# Altium PCB PCB.pcbdoc (part 2 of 3)
Units mm, origin at the board's own origin, x right, y up, seen from the top; angles counter-clockwise.
Board outline 351.03 x 186.31 mm, 2 copper layers (Top Layer, Bottom Layer); 478 components, 293 nets, 1523 pads, 747 vias.
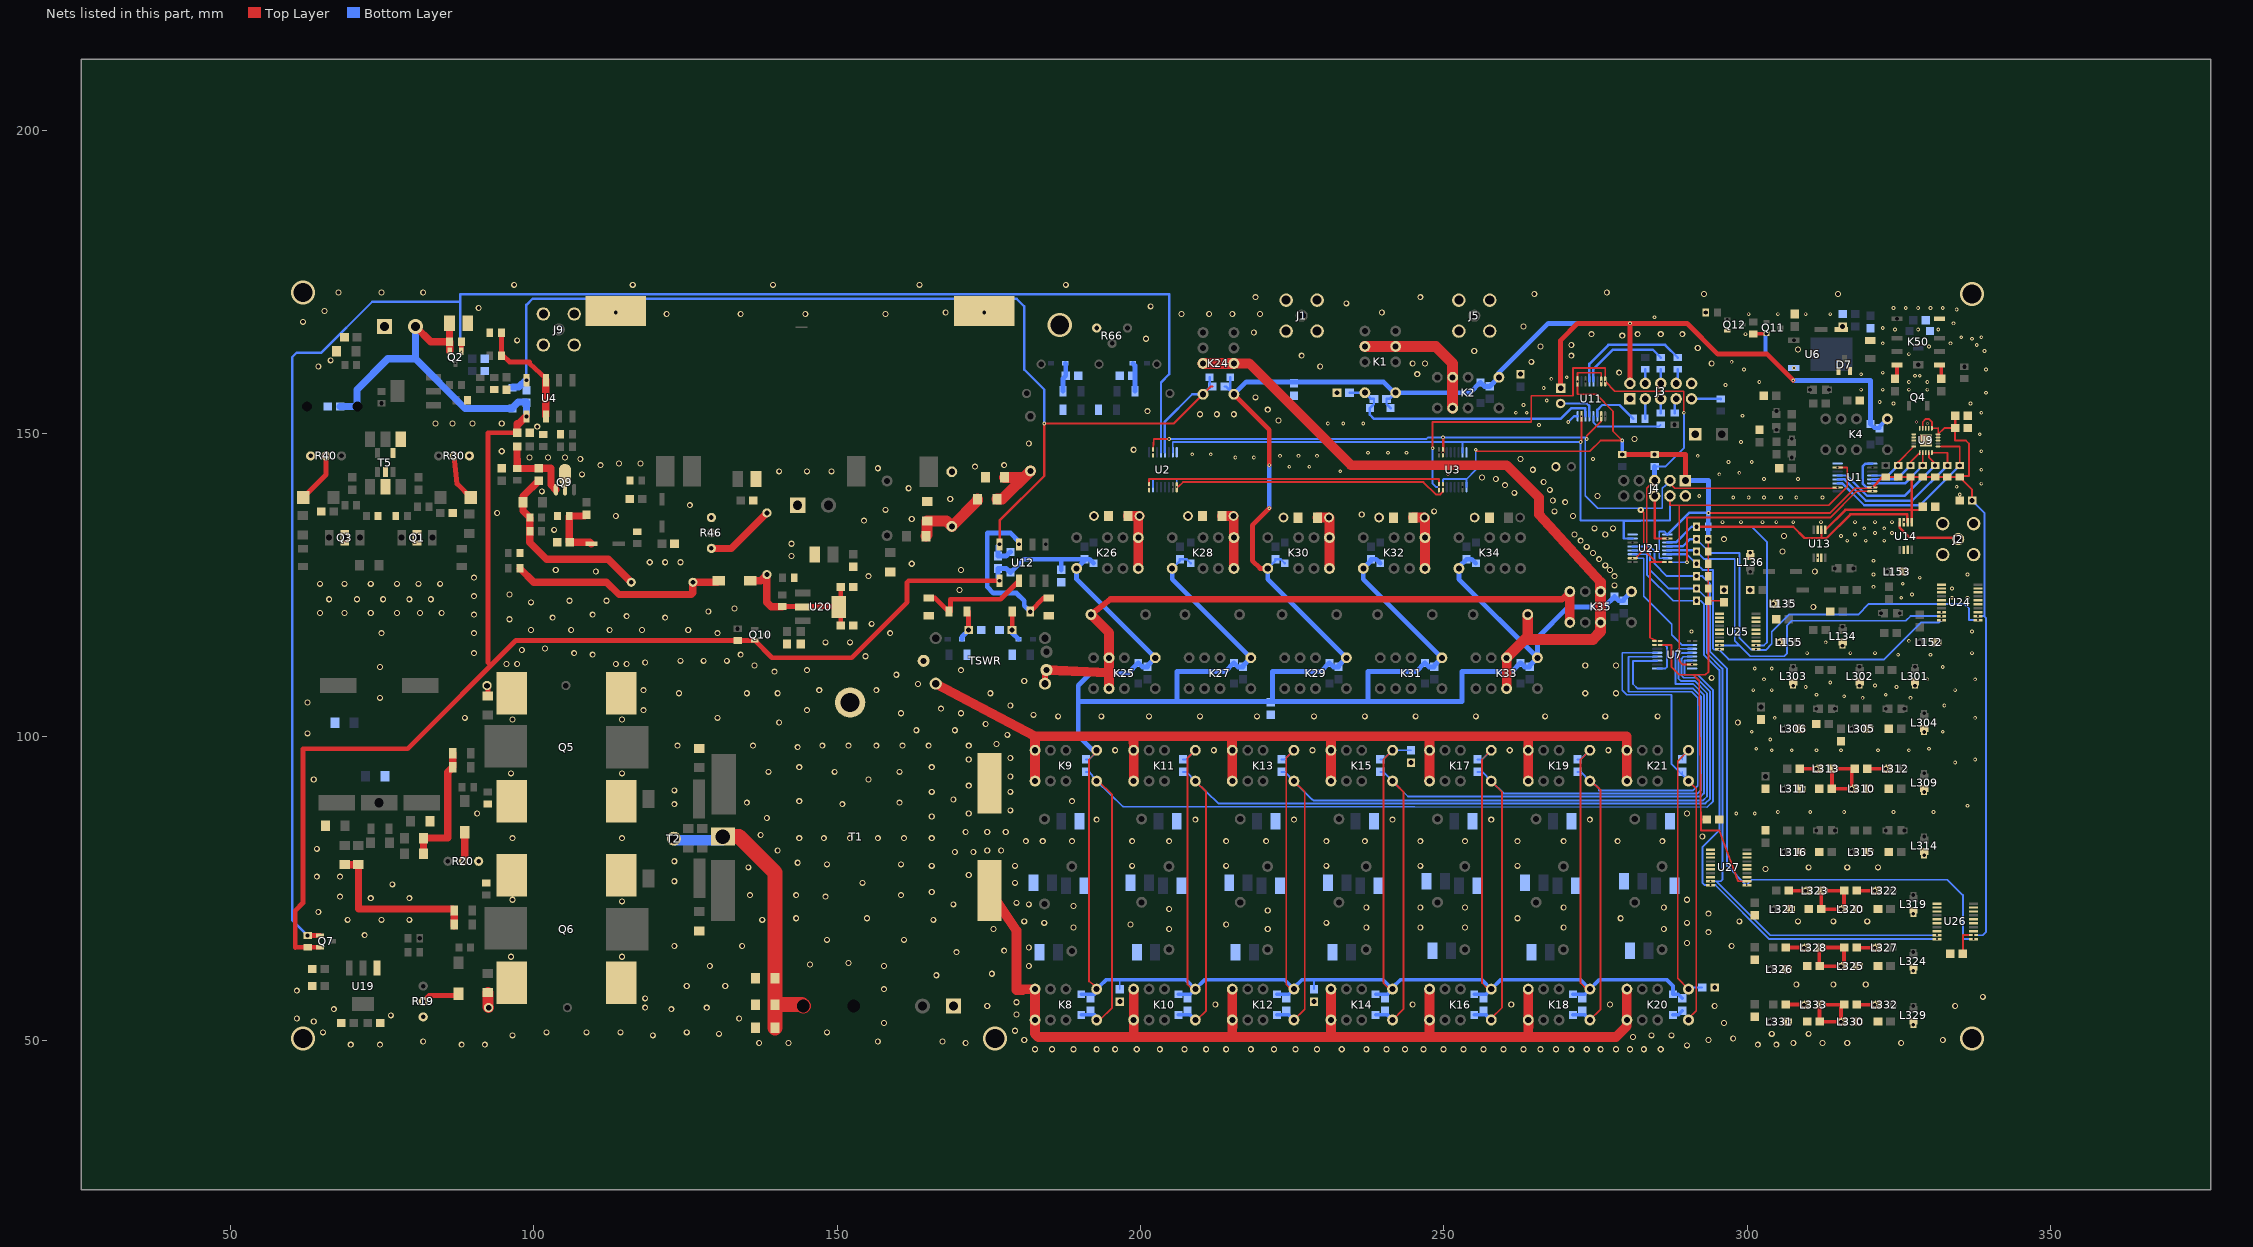
[diagram p2: the nets of this part, all layers, seen from the top]

## Via types
v1: diameter 1, hole 0.61, Top Layer to Bottom Layer, 525 vias
v2: diameter 0.61, hole 0.305, Top Layer to Bottom Layer, 207 vias
v3: diameter 4, hole 3.1, Top Layer to Bottom Layer, 7 vias
v4: diameter 0.61, hole 0.306, Top Layer to Bottom Layer, 3 vias
v5: diameter 0.5, hole 0.305, Top Layer to Bottom Layer, 3 vias
v6: diameter 0.61, hole 0.4, Top Layer to Bottom Layer, 1 vias
v7: diameter 1, hole 0.4, Top Layer to Bottom Layer, 1 vias

## Nets (pads, with @x,y where several pads share a name; then routed paths per layer and width w, separated by ;. In a path a pad name is that pad's centre, name@x,y a point inside that pad or via, vN(x,y) a via of type N, cw(c..) or ccw(c..) an arc to the next point about the centre after c; other vN are vias at no path point)
+3V3: C131.1 C132.1 C241.1 C301.1 C302.1 C303.1 C304.1 J4.1 R13.1 R31.1 R33.1 R35.1 R57.1 R69.1 R70.1 R71.1 R72.1 R201.1 R202.1 R203.1 R204.1 R205.1 R206.1 R207.1 U1.1 U1.7 U2.1 U2.7 U3.1 U3.7 U7.1 U7.7 U9.5 U9.6 U9.9 U11.1 U11.7 U13.1 U14.1 U21.1 U21.7 U24.2 U25.2 U26.2 U27.2 | length 456.2
  Top Layer w0.305: U2.1@205.994,141.224 206.248,141.224 207.01,141.986 246.634,141.986 248.666,139.954 249.428,139.954 249.834,140.36 U3.7@249.835,141.152 ; v2(255.27,147.32) 255.27,147.066 274.066,147.066 275.844,148.844 v2(279.4,148.844) 277.876,150.368 277.876,153.67 275.082,156.464 272.045,156.475 U11.1@272.045,158.568 ; U11.1@272.045,158.568 272.044,160.01 275.946,160.01 U11.7@275.945,158.568 ; U7.7@285.17,115.163 287.528,115.164 287.528,111.506 288.798,110.236 293.116,110.236 293.624,110.744 R202.1@293.574,132.588 ; 291.084,110.236 292.1,109.22 292.354,84.582 295.402,84.582 298.46,76.21 U27.2@299.927,76.211 ; 292.335,86.42 292.395,86.36 C304.1@293.356,86.36 ; R205.1@293.574,122.428 295.896,122.428 C302.1@296.164,122.16 ; v2(293.624,136.906) 313.69,136.906 317.754,140.97 320.467,140.97 U1.7@320.62,141.123 ; R57.1@322.834,142.798 R31.1@332.994,142.798 R72.1@335.026,142.798 337.072,140.752 C301.1@337.072,138.938 ; 327.111,137.414 328.408,137.414 C241.1@328.916,137.922 ; U9.9@328.93,150.851 328.93,151.892 329.438,152.4 329.946,152.4 330.429,151.917 330.429,150.851 331.445,150.851 331.47,150.876 331.47,149.86 331.445,149.835 332.486,150.876 C131.1@334.25,150.876 ; C131.1@334.25,150.876 334.249,148.857 336.042,148.844 336.55,148.336 336.55,143.002 335.229,143.002 R72.1@335.026,142.798 ; C303.1@335.548,64.262 335.545,64.265 335.545,67.321 U26.2@337.265,67.321
  Top Layer w0.4: U13.1@312.887,134.126 316.175,137.414 327.111,137.414 327.111,136.45 ; U1.7@320.62,141.123 322.295,142.798 R57.1@322.834,142.798 ; R70.1@326.898,142.798 327.111,142.585 U14.1@327.111,135.396 ; C131.1@334.25,150.876 C132.1@334.25,152.908
  Top Layer w0.8: R13.1@279.4,146.508 289.764,146.508 289.814,146.558 J4.1@289.814,142.24
  Bottom Layer w0.305: U2.7@202.083,141.152 202.082,142.494 205.984,142.494 U2.1@205.983,141.152 ; U3.7@249.835,141.152 249.834,142.392 249.936,142.494 253.746,142.494 ; U3.1@253.735,141.152 253.746,142.494 ; v2(255.27,147.32) 255.27,144.018 253.746,142.494 ; U7.1@285.17,111.263 286.522,111.262 286.766,111.506 286.766,114.808 286.41,115.164 U7.7@285.17,115.163 ; U21.7@286.838,129.439 285.496,129.438 285.496,133.858 286.319,133.858 U21.1@286.838,133.339 ; R201.1@293.574,134.62 300.736,134.62 303.276,132.08 303.276,115.57 302.768,115.062 U25.2@301.451,115.073 ; C301.1@337.058,138.938 339.09,136.906 339.09,119.899 338.027,119.899 339.079,119.899 339.344,119.634 339.344,67.818 338.836,67.31 U26.2@337.312,67.31
  Bottom Layer w0.4: U21.1@286.838,133.339 290.405,136.906 v2(293.624,136.906) ; U1.7@320.62,141.123 319.633,141.123 319.024,141.732 319.024,144.526 319.521,145.023 U1.1@320.62,145.023
  Bottom Layer w0.61: R13.1@279.4,146.508 v2(279.4,148.844)
  Bottom Layer w0.8: J4.1@289.814,142.24 293.624,142.24 R202.1@293.574,132.588
+12: C1.1 C7.1 C8.1 C9.1 C10.1 C11.1 C16.1 C107.1 C108.2 C109.2 C110.2 C115.1 C118.1 C119.1 C123.2 C124.1 C141.1 C142.2 C143.1 C144.2 C145.1 C146.2 C147.1 C148.2 C149.1 C150.2 C151.1 C152.2 C153.1 C154.2 C157.2 C158.2 C159.2 C160.2 C161.2 C162.2 C163.2 C164.2 C165.2 C166.2 C167.2 D4.1 D5.1 D8.1 D9.1 D13.1 D15.1 D17.1 D20.1 D22.1 D25.1 D27.1 D31.1 D32.1 D38.1 D39.1 D40.1 D41.1 D42.1 D43.1 D44.1 D45.1 D46.1 D47.1 D48.1 H1.1 J3.2 J8.2 K1.1 K2.1 K4.1 K8.1 K9.1 K10.1 K11.1 K12.1 K13.1 K14.1 K15.1 K16.1 K17.1 K18.1 K19.1 K20.1 K21.1 K24.1 K25.1 K26.1 K27.1 K28.1 K29.1 K30.1 K31.1 K32.1 K33.1 K34.1 K35.1 L43.2 Q2.2 Q7.2 Q10.2 Q11.2 R4.1 R41.1 R45.1 R48.2 U4.1 U12.1 | length 1255.3
  Top Layer w0.3: K9.1@193.04,97.79 191.516,96.266 191.516,60.96 191.516,59.69 K8.1@193.294,58.42 ; K10.1@209.042,58.42 208.534,58.42 207.772,59.182 207.772,96.52 K11.1@209.042,97.79 ; K12.1@225.298,58.42 224.79,58.42 224.028,59.182 224.028,96.52 K13.1@225.298,97.79 ; K14.1@241.554,58.42 241.046,58.42 240.03,59.436 240.03,96.266 K15.1@241.554,97.79 ; K16.1@257.81,58.42 257.302,58.42 256.286,59.436 256.286,96.266 K17.1@257.81,97.79 ; K18.1@274.066,58.42 273.558,58.42 272.542,59.436 272.542,96.266 K19.1@274.066,97.79 ; K20.1@290.322,58.42 288.544,60.198 288.544,96.012 K21.1@290.322,97.79
  Top Layer w0.61: R48.2@300.99,166.42 Q11.2@303.093,166.436
  Top Layer w0.8: R4.1@62.738,65.328 60.756,65.328 60.706,65.278 60.706,71.374 61.976,72.644 61.976,98.044 79.248,98.044 97.079,115.875 R45.1@133.604,115.874 Q10.2@136.414,115.89 139.273,113.03 152.4,113.03 161.544,122.174 161.544,125.476 161.798,125.73 U12.1@176.784,125.73 ; R4.1@62.738,65.328 Q7.2@64.786,65.344 ; 92.456,112.268 92.456,150.114 C118.1@97.268,150.114 ; K24.1@215.392,156.464 221.234,150.622 v2(221.234,144.78) ; K30.1@220.98,127.762 219.71,127.762 218.44,129.032 218.44,134.874 v2(221.234,137.668) ; H1.1@269.24,157.48 269.24,165.354 272.034,168.148 v2(280.67,168.148) ; J3.2@280.67,158.242 v2(280.67,168.148) ; v4(307.594,158.75) 303.276,163.068 295.148,163.068 290.068,168.148 v2(280.67,168.148)
  Top Layer w1.2: J8.2@80.518,167.64 83.058,165.1 R41.1@86.156,165.1 86.129,165.127 C119.1@86.129,168.148 ; R41.1@86.156,165.1 Q2.2@86.172,163.56 ; C118.1@97.268,150.114 97.268,151.624 ; 97.268,151.37 U4.1@98.806,152.908
  Bottom Layer w0.3: C142.2@191.008,96.28 191.53,96.28 K9.1@193.04,97.79 ; C144.2@207.01,96.28 207.532,96.28 K11.1@209.042,97.79 ; C146.2@223.266,96.28 223.788,96.28 K13.1@225.298,97.79 ; C148.2@239.522,96.28 240.044,96.28 K15.1@241.554,97.79 ; C150.2@255.524,96.28 256.3,96.28 K17.1@257.81,97.79 ; C152.2@272.034,96.28 272.556,96.28 K19.1@274.066,97.79 ; C154.2@289.306,96.28 289.306,96.774 K21.1@290.322,97.79
  Bottom Layer w0.305: C7.1@196.596,58.434 196.596,59.944 ; C8.1@228.6,58.434 228.6,59.944 ; K15.1@241.554,97.79 C9.1@244.602,97.803 ; K20.1@290.322,58.42 290.576,58.674 C1.1@292.594,58.674
  Bottom Layer w0.4: K28.1@205.232,127.762 206.502,129.032 206.502,129.272 207.61,129.272 D41.1@208.28,128.602 ; C124.1@213.882,157.734 214.122,157.734 K24.1@215.392,156.464 214.806,157.05 D32.1@214.806,159.258 ; K30.1@220.98,127.762 222.25,129.032 222.25,129.272 223.104,129.272 D43.1@223.774,128.602 ; D5.1@241.222,154.178 240.552,154.848 C107.1@240.552,155.702 241.046,155.702 K1.1@242.062,156.718
  Bottom Layer w0.61: D13.1@190.246,57.58 192.454,57.58 193.294,58.42 193.294,58.928 194.31,59.944 207.518,59.944 K10.1@209.042,58.42 ; D15.1@206.248,57.58 208.202,57.58 K10.1@209.042,58.42 ; D17.1@222.504,57.58 224.458,57.58 K12.1@225.298,58.42 ; D20.1@238.76,57.58 240.714,57.58 K14.1@241.554,58.42 ; D22.1@255.016,57.58 256.97,57.58 K16.1@257.81,58.42 ; D25.1@271.272,57.58 273.226,57.58 K18.1@274.066,58.42 ; D27.1@287.782,57.58 287.782,58.928 286.766,59.944 275.59,59.944 K18.1@274.066,58.42 ; D27.1@287.782,57.58 288.636,57.58 C153.1@289.306,56.91 ; Q11.2@303.022,166.37 303.022,163.322 v4(307.594,158.75) ; D9.1@320.294,151.56 320.964,150.89 C123.2@321.818,150.89 321.818,151.13 K4.1@323.088,152.4 ; K10.1@209.042,58.42 210.566,59.944 223.774,59.944 K12.1@225.298,58.42 ; K12.1@225.298,58.42 225.298,58.674 226.568,59.944 240.03,59.944 K14.1@241.554,58.42 ; K14.1@241.554,58.42 241.554,58.674 242.824,59.944 256.286,59.944 K16.1@257.81,58.42 ; K16.1@257.81,58.42 259.334,59.944 272.542,59.944 K18.1@274.066,58.42
  Bottom Layer w0.8: U12.1@176.784,125.73 176.53,125.984 C109.2@176.53,127.748 177.892,127.748 D31.1@178.562,127.078 180.756,129.272 C158.2@190.754,129.272 ; C11.1@186.944,127.522 186.944,129.219 186.997,129.272 ; 189.738,105.802 252.984,105.802 ; D39.1@192.278,128.602 191.608,129.272 C158.2@190.754,129.272 ; K9.1@192.786,97.79 192.151,97.79 189.738,100.203 189.738,108.458 191.77,110.49 197.945,110.49 D38.1@199.644,112.19 ; D38.1@199.644,112.19 200.314,111.52 C157.2@201.168,111.52 201.168,111.76 K25.1@202.438,113.03 189.484,125.984 K26.1@189.484,127.762 190.754,129.032 C158.2@190.754,129.272 ; K28.1@205.232,127.762 205.232,125.984 K27.1@218.186,113.03 216.916,111.76 C159.2@216.916,111.52 216.062,111.52 D40.1@215.392,112.19 213.946,110.744 205.994,110.744 205.994,105.918 ; K24.1@215.392,156.464 217.424,158.496 240.03,158.496 242.062,156.464 K1.1@242.062,156.718 254.332,156.718 D8.1@256.032,158.418 256.702,157.748 C110.2@257.556,157.748 ; K30.1@220.98,127.762 220.98,125.984 K29.1@233.934,113.03 232.664,111.76 C161.2@232.664,111.52 231.81,111.52 D42.1@231.14,112.19 229.694,110.744 221.742,110.744 C10.1@221.742,105.918 ; v2(221.234,137.668) v2(221.234,144.78) ; 237.49,105.918 237.49,110.744 245.442,110.744 D44.1@246.888,112.19 247.558,111.52 C163.2@248.412,111.52 248.412,111.76 K31.1@249.682,113.03 236.728,125.984 K32.1@236.728,127.762 237.998,129.032 237.998,129.272 238.852,129.272 D45.1@239.522,128.602 ; 252.984,105.918 252.984,110.744 261.19,110.744 D46.1@262.636,112.19 263.306,111.52 C165.2@264.16,111.52 264.16,111.76 K33.1@265.43,113.03 ; D47.1@255.27,128.602 254.6,129.272 253.746,129.272 252.476,128.002 K34.1@252.476,127.762 252.476,125.984 K33.1@265.43,113.03 ; C110.2@257.556,157.747 K2.1@259.08,159.258 259.08,160.02 267.208,168.148 v2(280.67,168.148) ; D48.1@278.13,123.112 276.431,121.412 270.51,121.412 265.43,116.332 K33.1@265.43,113.03 ; D48.1@278.13,123.112 278.8,122.442 C167.2@279.654,122.442 279.654,122.682 K35.1@280.924,123.952 ; v4(307.594,158.75) 320.294,158.75 D9.1@320.294,151.56
  Bottom Layer w1.2: C115.1@68.086,154.432 L43.2@70.952,154.432 70.866,154.518 70.866,157.226 75.946,162.306 80.518,162.306 ; D4.1@96.52,154.129 88.695,154.129 80.518,162.306 ; D4.1@96.52,154.256 97.444,155.18 98.806,155.18 U4.1@98.806,152.908 ; 80.518,162.306 J8.2@80.518,167.64 80.518,162.306
ADC: J2.5 U14.4 | length 11.3
  Top Layer w0.4: U14.4@325.161,135.396 325.161,134.44 326.758,132.842 334.518,132.842 J2.5@334.772,132.588
ANT1-2OUT: C107.2 C171.2 D5.2 K1.12 U11.14 | length 45.2
  Bottom Layer w0.4: C171.2@234.456,156.718 K1.12@236.982,156.718 237.998,155.702 C107.2@238.492,155.702 238.492,154.848 D5.2@237.822,154.178 ; D5.2@237.822,154.178 237.823,153.083 238.506,152.4 269.24,152.4 271.018,154.178 273.304,154.178 273.304,152.878 U11.14@273.345,152.836
ANTOUT: K1.4 K1.9 K2.4 K2.9 | length 23
  Top Layer w1.8: K1.9@236.982,164.338 K1.4@242.062,164.338 248.666,164.338 251.46,161.544 K2.4@251.46,159.258 K2.9@251.46,154.178
ATTON0.5: R31.2 U1.12 U9.20 | length 26.6
  Top Layer w0.305: U9.20@330.429,146.837 330.454,146.812 332.994,146.812 R31.2@332.994,144.73
  Bottom Layer w0.4: U1.12@314.888,142.423 316.047,142.423 319.532,138.938 327.202,138.938 R31.2@332.994,144.73
ATTON1: R33.2 U1.13 U9.19 | length 22.1
  Top Layer w0.305: U9.19@329.946,146.837 329.946,146.05 330.962,145.034 R33.2@330.962,144.73
  Bottom Layer w0.4: U1.13@314.888,143.073 316.413,143.073 319.786,139.7 325.932,139.7 R33.2@330.962,144.73
ATTON2: R69.2 U1.6 U9.17 | length 11.6
  Top Layer w0.305: R69.2@328.93,144.73 U9.17@328.93,146.837
  Bottom Layer w0.4: U1.6@320.62,141.773 325.973,141.773 R69.2@328.93,144.73
ATTON4: R70.2 U1.5 U9.16 | length 10
  Top Layer w0.305: R70.2@326.898,144.73 326.898,145.288 U9.16@328.447,146.837
  Bottom Layer w0.4: U1.5@320.62,142.423 324.591,142.423 R70.2@326.898,144.73
ATTON8: R71.2 U1.4 U9.15 | length 9.1
  Top Layer w0.305: R71.2@324.866,144.73 324.866,145.288 U9.15@327.431,147.853
  Bottom Layer w0.4: U1.4@320.62,143.073 323.209,143.073 R71.2@324.866,144.73
ATTON16: R72.2 U1.11 U9.1 | length 30.6
  Top Layer w0.305: 331.907,147.853 335.001,147.853 335.026,147.828 R72.2@335.026,144.73
  Bottom Layer w0.4: U1.11@314.888,141.773 315.681,141.773 319.278,138.176 328.472,138.176 R72.2@335.026,144.73
BANDOUT0: R11.2 U11.4 | length 19.6
  Bottom Layer w0.4: U11.4@273.995,158.568 273.995,161.473 277.114,164.592 286.462,164.592 R11.2@288.544,162.51
BANDOUT1: R3.1 U11.11 | length 8.3
  Bottom Layer w0.4: U11.11@275.295,152.836 275.295,153.883 276.098,154.686 278.942,154.686 R3.1@281.228,152.4
BANDOUT2: R9.2 U11.5 | length 15
  Bottom Layer w0.4: U11.5@274.645,158.568 274.645,160.599 277.876,163.83 284.43,163.83 R9.2@285.75,162.51
BANDOUT3: R8.1 U11.12 | length 12.5
  Bottom Layer w0.305: U11.12@274.645,152.836 274.645,151.821 275.336,151.13 285.446,151.13 R8.1@285.75,151.434
BPF1: C153.2 C154.1 D27.2 K20.12 K21.12 U7.5 | length 79.9
  Top Layer w0.3: K20.12@290.322,53.34 290.322,53.594 291.592,54.864 291.592,91.44 K21.12@290.322,92.71
  Bottom Layer w0.3: C154.1@289.306,94.22 289.306,93.726 K21.12@290.322,92.71
  Bottom Layer w0.305: U7.5@285.17,113.863 279.4,113.863 279.4,107.696 280.162,106.934 287.528,106.934 287.528,95.504 K21.12@290.322,92.71
  Bottom Layer w0.61: D27.2@287.782,54.18 288.636,54.18 C153.2@289.306,54.85
BPF1A0: R203.2 U21.6 U24.20 U25.20 | length 62.7
  Bottom Layer w0.305: R203.2@291.642,128.524 292.658,127.508 294.386,127.508 294.386,114.554 294.517,114.423 U25.20@295.449,114.423 ; U25.20@295.449,114.423 295.448,114.254 296.926,112.776 322.58,112.776 328.676,118.872 331.648,118.872 U24.20@332.025,119.249
  Bottom Layer w0.4: U21.6@286.838,130.089 290.027,130.089 291.592,128.524 R203.2@291.642,128.524
BPF1A1: R204.2 U21.5 U24.19 U25.19 | length 69
  Bottom Layer w0.305: R204.2@291.642,130.556 292.912,129.286 297.942,129.286 297.942,115.824 300.482,113.284 306.07,113.284 306.578,113.792 306.578,118.364 307.34,119.126 326.136,119.126 326.909,119.899 U24.19@332.03,119.899 ; U25.19@295.455,115.072 298.686,115.08
  Bottom Layer w0.4: U21.5@286.838,130.739 291.459,130.739 R204.2@291.642,130.556
BPF1EN: R202.2 U21.4 U24.1 U25.1 | length 74
  Bottom Layer w0.305: R202.2@291.642,132.588 293.929,130.302 298.704,130.302 298.704,116.332 300.614,114.422 U25.1@301.451,114.423 301.574,114.3 303.022,114.3 304.038,115.316 304.038,117.348 306.832,120.142 318.262,120.142 320.04,121.92 335.788,121.92 336.55,121.158 336.55,119.248 U24.1@338.027,119.249
  Bottom Layer w0.4: U21.4@286.838,131.389 289.377,131.389 290.576,132.588 R202.2@291.642,132.588
BPF2: C151.2 C152.1 D25.2 K18.12 K19.12 U7.4 | length 102.5
  Top Layer w0.3: K18.12@274.066,53.34 275.844,55.118 275.844,91.186 274.32,92.71 K19.12@274.066,92.71
  Bottom Layer w0.3: C152.1@272.034,94.22 272.556,94.22 K19.12@274.066,92.71
  Bottom Layer w0.305: K19.12@274.066,92.71 274.32,92.71 275.59,91.44 275.59,91.186 291.084,91.186 291.846,91.948 291.846,106.426 290.83,107.442 280.416,107.442 280.416,113.213 U7.4@285.17,113.213
  Bottom Layer w0.61: D25.2@271.272,54.18 273.226,54.18 K18.12@274.066,53.34
BPF2A0: R205.2 U21.11 U26.20 U27.20 | length 107.8
  Bottom Layer w0.305: U21.11@281.106,130.089 283.464,130.089 283.464,126.746 287.782,122.428 R205.2@291.642,122.428 292.354,122.428 292.862,121.92 292.862,113.538 295.402,110.998 295.402,84.582 292.608,81.788 292.608,75.946 292.993,75.561 U27.20@293.925,75.561 294.771,75.561 303.661,66.671 U26.20@331.263,66.671
BPF2A1: R207.2 U21.12 U26.19 U27.19 | length 107.8
  Bottom Layer w0.305: U21.12@281.106,130.739 283.789,130.739 283.972,130.556 283.972,127.508 287.02,124.46 R207.2@291.642,124.46 ; R207.2@291.642,124.46 293.37,122.733 293.37,113.792 295.91,111.252 295.91,76.454 295.666,76.21 293.931,76.21 294.884,76.21 303.784,67.31 U26.19@331.269,67.31
BPF2EN: R206.2 U21.13 U26.1 U27.1 | length 114.7
  Bottom Layer w0.305: U21.13@281.106,131.389 283.901,131.389 284.734,130.556 284.734,128.524 286.766,126.492 R206.2@291.642,126.492 292.608,126.492 293.878,125.222 293.878,114.046 296.672,111.252 296.672,78.74 299.851,75.561 U27.1@299.927,75.561 299.927,75.645 300.736,76.454 332.994,76.454 335.534,73.914 335.534,66.802 335.665,66.671 U26.1@337.265,66.671
BPF3: C149.2 C150.1 D22.2 K16.12 K17.12 U7.3 | length 117.8
  Top Layer w0.3: K16.12@257.81,53.34 257.81,53.594 259.588,55.372 259.588,90.932 K17.12@257.81,92.71
  Bottom Layer w0.3: C150.1@255.524,94.22 256.3,94.22 K17.12@257.81,92.71
  Bottom Layer w0.305: K17.12@257.81,92.71 259.842,90.678 290.068,90.678 291.846,90.678 292.354,91.186 292.354,96.52 292.354,106.68 291.084,107.95 281.94,107.95 281.178,108.712 281.178,112.522 285.13,112.522 U7.3@285.17,112.563
  Bottom Layer w0.61: D22.2@255.016,54.18 256.97,54.18 K16.12@257.81,53.34
BPF4: C147.2 C148.1 D20.2 K14.12 K15.12 U7.11 | length 129.1
  Top Layer w0.3: K14.12@241.554,53.34 243.332,55.118 243.332,90.932 K15.12@241.554,92.71
  Bottom Layer w0.3: C148.1@239.522,94.22 240.044,94.22 K15.12@241.554,92.71
  Bottom Layer w0.305: K15.12@241.554,92.71 244.094,90.17 289.814,90.17 292.354,90.17 292.862,90.678 292.862,106.934 291.084,108.712 288.163,108.712 288.163,113.919 288.757,114.513 U7.11@290.902,114.513
  Bottom Layer w0.61: D20.2@238.76,54.18 240.714,54.18 K14.12@241.554,53.34
BPF5: C145.2 C146.1 D17.2 K12.12 K13.12 U7.12 | length 145.1
  Top Layer w0.3: K12.12@225.298,53.34 227.076,55.118 227.076,90.932 K13.12@225.298,92.71
  Bottom Layer w0.3: C146.1@223.266,94.22 223.788,94.22 K13.12@225.298,92.71
  Bottom Layer w0.305: K13.12@225.298,92.71 228.346,89.662 ; 228.473,89.535 292.735,89.535 293.37,90.17 293.37,107.188 291.338,109.22 289.052,109.22 288.671,109.601 288.671,113.411 289.052,113.792 290.83,113.792 U7.12@290.902,113.863
  Bottom Layer w0.61: D17.2@222.504,54.18 224.458,54.18 K12.12@225.298,53.34
BPF6: C143.2 C144.1 D15.2 K10.12 K11.12 U7.13 | length 161.5
  Top Layer w0.3: K10.12@209.042,53.34 209.296,53.34 210.82,54.864 210.82,90.932 K11.12@209.042,92.71
  Bottom Layer w0.3: C144.1@207.01,94.22 207.532,94.22 K11.12@209.042,92.71
  Bottom Layer w0.305: K11.12@209.042,92.71 212.852,89.027 293.116,89.027 293.878,89.789 293.878,107.442 291.592,109.728 289.56,109.728 289.179,110.109 289.179,112.903 289.489,113.213 U7.13@290.902,113.213
  Bottom Layer w0.61: D15.2@206.248,54.18 208.202,54.18 K10.12@209.042,53.34
BPF7: C141.2 C142.1 D13.2 K8.12 K9.12 U7.14 | length 178.3
  Top Layer w0.3: K9.12@193.04,92.71 195.326,90.424 195.326,55.372 K8.12@193.294,53.34
  Bottom Layer w0.3: C142.1@191.008,94.22 191.53,94.22 K9.12@192.786,92.71
  Bottom Layer w0.305: K9.12@192.786,92.71 197.104,88.519 293.37,88.392 294.386,89.408 294.386,107.696 291.846,110.236 289.687,110.236 289.687,112.563 U7.14@290.902,112.563
  Bottom Layer w0.61: D13.2@190.246,54.18 192.454,54.18 K8.12@193.294,53.34
BPFON: R201.2 U13.2 U14.2 U21.3 | length 45.6
  Top Layer w0.4: R201.2@291.642,134.62 307.594,134.62 309.443,132.771 312.237,132.771 ; U13.2@312.237,134.125 312.237,132.771 ; U14.2@326.461,135.396 326.39,135.467 326.39,136.652 316.992,136.652 313.111,132.771 312.237,132.771
  Bottom Layer w0.4: U21.3@286.838,132.039 288.249,132.039 290.83,134.62 R201.2@291.642,134.62
C2_1: C2.1 C3.2 C5.2 L3.2 | length 13.2
  Top Layer w1.8: C2.1@164.661,133.096 164.846,133.281 C5.2@164.846,135.567 168.034,135.567 L3.2@168.91,134.692 173.159,138.941 C3.2@173.159,139.192
C3_1: C3.1 C6.2 L2.1 | length 12.1
  Top Layer w1.8: C3.1@176.345,139.192 177.22,139.192 L2.1@181.864,143.836 180.776,142.748 C6.2@177.615,142.748
C53_2: C53.2 R1.1 | length 1.8
  Top Layer w0.8: R1.1@92.444,108.521 92.456,108.509 C53.2@92.456,106.749
C54_2: C54.2 R2.1 | length 2.5
  Top Layer w1.8: C54.2@92.456,57.843 92.456,55.476 R2.1@92.56,55.372
C58_2: C58.2 C61.2 C106.2 L30.1 pad.2 T1.3 T2.5 | length 49.7
  Top Layer w1.8: C58.2@139.7,60.267 C58.2@139.769,60.198
  Top Layer w2.5: T1.3@131.191,83.566 133.858,83.566 139.769,77.655 C58.2@139.769,60.198 C106.2@139.769,52.07 ; C61.2@139.769,55.88 144.186,55.88 L30.1@144.44,55.626
  Bottom Layer w1.8: T2.5@123.376,82.959 131.092,82.959 T1.3@131.445,83.312
C67_2: C65.1 C67.2 C68.2 L33.2 | length 11
  Top Layer w1.2: C67.2@108.712,136.638 108.472,136.398 L33.2@105.868,136.398 105.868,132.144 C68.2@105.932,132.08 109.256,132.08 C65.1@109.51,131.826
C71_2: C69.1 C71.2 Q9.G R26.2 | length 13.1
  Top Layer w1.2: C71.2@97.268,147.828 R26.2@97.282,144.222 ; R26.2@97.282,144.222 100.774,144.222 C69.1@100.838,144.286 ; C69.1@100.838,144.285 102.855,144.285 102.87,141.521 Q9.G@103.656,140.736
C94_2: C92.2 C94.2 R38.1 R74.1 | length 20.8
  Top Layer w1.2: C92.2@81.857,80.772 C94.2@81.857,83.312 85.852,83.312 85.852,94.189 R74.1@86.659,94.996 R38.1@86.659,97.282
C96_1: C84.1 C96.1 K26.5 K26.8 | length 10.6
  Top Layer w1.6: C84.1@197.935,136.398 C96.1@199.838,136.398 199.644,136.204 K26.8@199.644,132.842 K26.5@199.644,127.762
C97_1: C85.1 C97.1 K28.5 K28.8 | length 10.6
  Top Layer w1.6: C85.1@213.429,136.398 C97.1@215.332,136.398 215.392,136.338 K28.8@215.392,132.842 K28.5@215.392,127.762
C98_1: C86.1 C98.1 K30.5 K30.8 | length 10.3
  Top Layer w1.6: C86.1@229.177,136.144 C98.1@231.08,136.144 231.14,136.084 K30.8@231.14,132.842 K30.5@231.14,127.762
C99_1: C87.1 C99.1 K32.5 K32.8 | length 10.3
  Top Layer w1.6: C87.1@244.925,136.144 C99.1@246.828,136.144 246.888,136.084 K32.8@246.888,132.842 K32.5@246.888,127.762
C102_2: C102.2 C104.2 R47.1 R76.1 | length 28
  Top Layer w1.2: C104.2@68.834,78.925 C102.2@71.12,78.925 71.12,71.628 86.659,71.628 R47.1@86.913,71.374 R76.1@86.913,68.834
C112_1: C112.1 K50.4 | length 2.4
  Top Layer w0.61: C112.1@324.358,159.018 324.668,159.328 K50.4@324.668,161.3
C120_1: C120.1 K50.5 | length 2.4
  Top Layer w0.61: K50.5@331.668,161.3 331.978,160.99 C120.1@331.978,159.018
C320_1: C320.1 L312.2 | length 3
  Top Layer w0.61: C320.1@319.8,94.742 L312.2@322.808,94.722
C321_1: C321.1 L313.2 | length 2.8
  Top Layer w0.61: C321.1@308.624,94.742 L313.2@311.378,94.722
C323_2: C320.2 C323.2 L310.2 L313.1 | length 13.6
  Top Layer w0.61: C323.2@313.958,91.44 313.958,94.202 L313.1@314.478,94.722 C320.2@317.74,94.742 ; C323.2@313.958,91.44 L310.2@317.22,91.42 317.22,94.222 C320.2@317.74,94.742
C344_1: C344.1 L322.2 | length 3
  Top Layer w0.61: C344.1@318.022,74.676 L322.2@321.03,74.656
C345_1: C345.1 L323.2 | length 2.8
  Top Layer w0.61: C345.1@306.846,74.676 L323.2@309.6,74.656
C347_2: C344.2 C347.2 L320.2 L323.1 | length 12.9
  Top Layer w0.61: L323.1@312.116,74.676 312.18,74.612 C347.2@312.18,71.628 ; C347.2@312.18,71.628 L320.2@315.442,71.608 315.962,72.128 C344.2@315.962,74.676 ; L323.1@312.7,74.656 C344.2@315.962,74.676
C358_1: C358.1 L327.2 | length 3
  Top Layer w0.61: C358.1@318.022,65.278 L327.2@321.03,65.258
C359_1: C359.1 L328.2 | length 3.6
  Top Layer w0.61: C359.1@306.338,65.278 L328.2@309.93,65.278
C361_2: C358.2 C361.2 L325.2 L328.1 | length 14
  Top Layer w0.61: C361.2@311.926,62.23 311.862,62.294 L328.1@311.862,65.278 C358.2@315.962,65.278 315.962,62.73 L325.2@315.442,62.21 C361.2@311.926,62.23
C372_1: C372.1 L332.2 | length 3
  Top Layer w0.61: C372.1@318.022,55.88 L332.2@321.03,55.86
C373_1: C373.1 L333.2 | length 3.6
  Top Layer w0.61: C373.1@306.338,55.88 L333.2@309.93,55.88
C375_2: C372.2 C375.2 L330.2 L333.1 | length 12.9
  Top Layer w0.61: L333.1@311.862,55.88 311.926,55.816 C375.2@311.926,53.086 ; C375.2@311.926,53.086 L330.2@315.442,53.066 315.442,55.36 C372.2@315.962,55.88 ; L333.1@312.446,55.86 C372.2@315.962,55.88
CTRLCLK: J4.4 U1.15 U2.15 U3.15 U7.15 U11.15 U21.15 | length 179.1
  Top Layer w0.305: v2(272.542,148.59) 272.695,148.743 U11.15@272.695,152.836 ; J4.4@287.274,139.7 287.274,138.176 313.436,138.176 316.484,141.224 316.484,144.374 U1.15@314.888,144.373 ; 288.29,138.176 288.798,138.176 288.798,112.522 289.408,111.912 U7.15@290.902,111.913
  Bottom Layer w0.305: U2.15@205.333,146.884 205.334,148.59 v2(272.542,148.59) 272.542,135.636 287.274,135.636 J4.4@287.274,139.7 ; U3.15@253.085,146.884 253.086,148.59 253.114,148.59
  Bottom Layer w0.4: U21.15@281.106,132.689 279.654,132.69 279.654,135.636 282.395,135.636
CTRLDATA: J4.6 U21.2 | length 9.1
  Top Layer w0.4: J4.6@284.734,139.7 284.734,132.69 U21.2@286.838,132.689
CTRLOE: J4.5 R35.2 U1.8 U2.8 U3.8 U7.8 U11.8 U21.8 | length 208.8
  Top Layer w0.21: U11.8@276.595,158.568 278.191,156.972 289.56,156.972 v2(289.56,153.416) ; J4.5@284.734,142.24 283.464,140.97 283.464,130.302 284.988,128.778 U21.8@286.838,128.789
  Top Layer w0.305: U2.8@201.433,141.152 201.432,142.494 249.174,142.494 U3.8@249.174,141.224 ; v2(248.158,147.574) 248.158,151.892 264.414,151.892 264.414,156.21 271.272,156.21 271.272,160.782 276.606,160.782 U11.8@276.595,158.568 ; U7.8@285.17,115.813 283.972,116.332 283.972,128.788 U21.8@286.838,128.789 ; v2(290.068,128.778) 290.068,136.144 313.69,136.144 318.008,140.462 U1.8@320.62,140.473
  Bottom Layer w0.305: v2(248.158,147.574) 248.158,141.732 248.738,141.152 U3.8@249.185,141.152 ; R35.2@284.734,144.576 286.562,144.576 289.56,147.574 v2(289.56,153.416) ; U21.8@286.838,128.789 286.849,128.778 v2(290.068,128.778)
  Bottom Layer w0.8: J4.5@284.734,142.24 R35.2@284.734,144.576
CTRLRCLK: J4.3 U1.10 U2.10 U3.10 U7.10 U11.10 U21.10 | length 167.3
  Top Layer w0.21: J4.3@287.274,142.24 287.274,141.732 288.036,140.97 314.889,140.97 U1.10@314.888,141.123
  Top Layer w0.305: U2.10@202.083,146.884 202.184,149.098 v2(204.724,149.098) ; v2(273.558,149.098) 273.558,149.606 275.946,151.994 U11.10@275.945,152.836 ; U21.10@281.106,129.439 281.585,129.439 282.956,130.81 282.956,136.906 v7(282.448,137.414)
  Top Layer w0.4: U3.10@249.835,146.884 249.869,146.918 v2(249.869,149.352)
  Bottom Layer w0.21: 286.004,137.668 286.004,140.97
  Bottom Layer w0.305: v2(204.724,149.098) 247.142,149.098 247.396,149.352 v2(249.869,149.352) 273.304,149.352 v2(273.558,149.098) 273.304,149.098 273.304,139.7 275.336,137.668 286.004,137.668 ; U21.10@281.106,129.439 282.956,129.438 282.956,123.19 287.558,118.588 287.558,116.81 289.204,115.164 U7.10@290.902,115.163 ; 286.004,140.97 J4.3@287.147,141.986
D1_1: C113.1 D1.1 R49.2 | length 5
  Top Layer w0.8: R49.2@171.659,120.65 171.659,117.633 C113.1@171.69,117.602
  Bottom Layer w0.8: D1.1@170.591,116.078 170.59,116.502 C113.1@171.69,117.602
D3_1: C117.2 D3.1 R50.2 | length 5
  Top Layer w0.8: C117.2@178.83,117.602 178.861,117.633 R50.2@178.861,120.65
  Bottom Layer w0.8: C117.2@178.83,117.602 178.83,117.178 D3.1@179.929,116.078
D18_2: D18.2 R30.2 | length 7.8
  Top Layer w0.8: R30.2@86.858,146.304 87.376,141.692 D18.2@89.622,139.446
D23_2: D23.2 R40.2 | length 8.4
  Top Layer w0.8: D23.2@62.016,139.446 65.776,143.205 R40.2@65.776,146.304
D35_2: D35.2 R19.2 | length 6.2
  Top Layer w0.8: R19.2@81.788,56.398 82.769,57.379 D35.2@87.63,57.379
D36_2: D36.2 R20.2 | length 4.9
  Top Layer w1.2: R20.2@88.402,79.502 88.646,79.746 88.646,80.284 D36.2@88.646,84.303
D37_2: C78.2 C83.2 D37.2 FB2.2 R51.2 U20.2 U20.4 | length 26.3
  Top Layer w0.8: R51.2@140.97,121.462 150.24,121.462 U20.4@150.29,121.412 ; C83.2@150.608,118.364 C78.2@150.608,124.714
  Top Layer w1.2: D37.2@135.661,125.73 137.414,125.73 FB2.2@138.43,126.746 138.43,122.174 139.142,121.462 R51.2@140.97,121.462
D49_1: C89.1 D49.1 R65.2 | length 4.8
  Bottom Layer w0.8: R65.2@187.243,156.972 187.243,159.063 C89.1@187.692,159.512 187.692,161.46 D49.1@187.609,161.544
D50_1: C90.2 D50.1 R67.2 | length 4.7
  Bottom Layer w0.8: D50.1@198.725,161.544 199.091,161.179 R67.2@199.091,156.972
FANOUT: H1.2 U11.13 | length 6.6
  Bottom Layer w0.4: H1.2@269.24,154.94 273.558,154.94 273.995,154.503 U11.13@273.995,152.836
FB1_1: D37.1 FB1.1 R32.1 | length 36.6
  Top Layer w1.2: R32.1@97.74,127.762 100.026,125.476 112.014,125.476 114.046,123.444 125.984,123.444 126.238,123.698 FB1.1@126.238,125.476 130.277,125.476 D37.1@130.53,125.73
FB1_2: C69.2 FB1.2 L31.2 R21.2 R22.2 | length 31.2
  Top Layer w1.2: C69.2@100.838,142.227 98.298,139.7 98.298,138.753 L31.2@98.229,138.684 98.229,137.278 R21.2@99.364,136.144 R22.2@99.364,133.858 99.364,132.03 102.108,129.286 112.268,129.286 FB1.2@116.078,125.476
FB2_1: FB2.1 R46.3 | length 11.6
  Top Layer w1.2: R46.3@129.286,131.054 132.578,131.054 FB2.1@138.43,136.906
GND: C1.2 C4.1 C5.1 C6.1 C7.2 C8.2 C9.2 C10.2 C11.2 C12.1 C13.1 C14.1 C15.1 C16.2 C17.1 C18.1 C19.1 C20.1 C22.1 C23.1 C24.1 C25.1 C27.1 C28.1 C29.1 C30.1 C32.1 C33.1 C34.1 C35.1 C37.1 C39.1 C40.1 C41.1 C43.1 C44.1 C45.1 C46.1 C52.2 C55.1 C56.1 C58.1 C59.2 C61.1 C62.2 C63.2 C64.2 C68.1 C70.2 C72.1 C73.1 C74.2 C75.2 C76.1 C77.2 C78.1 C79.1 C82.1 C83.1 C84.2 C85.2 C86.2 C87.2 C88.2 C89.2 C90.1 C91.1 C95.1 C96.2 C97.2 C98.2 C99.2 C100.2 C103.1 C105.1 C106.1 C113.2 C114.2 C115.2 C116.1 C117.1 C118.2 C119.2 C121.1 C122.1 C126.2 C127.1 C128.2 C129.2 C130.1 C131.2 C132.2 C133.2 C136.2 C137.2 C170.1 C171.1 C204.1 C207.1 C208.1 C210.2 C241.2 C301.2 C302.2 C303.2 C304.2 C307.1 C313.1 C314.1 C315.1 C322.1 C323.1 C324.1 C334.1 C335.1 C336.1 C346.1 C347.1 C348.1 C360.1 C361.1 C362.1 C374.1 C375.1 C376.1 C388.1 C389.1 C390.1 D2.2 D7.1 D7.2 D51.2 J1.1 J1.2 J1.3 J1.4 J2.1 J2.2 J2.3 J2.4 J3.1 J3.10 J4.2 J5.1 J5.2 J5.3 J5.4 J6.1 J7.1 J8.1 J9.1 J9.2 J9.3 J9.4 K50.8 L3.1 L32.1 L33.1 L34.1 L134.1 L135.1 L136.1 L152.1 L153.1 L155.1 L301.1 L302.1 L303.1 L304.1 L305.1 L306.1 L309.1 L310.1 L311.1 L314.1 L315.1 L316.1 L319.1 L320.1 L321.1 L324.1 L325.1 L326.1 L329.1 L330.1 L331.1 pad.3 pad.4 pad.7 pad.8 Q1.2 Q3.2 Q4.2 Q5.S Q6.S Q9.S Q12.2 R14.1 R19.3 R20.1 R24.1 R25.1 R30.3 R36.1 R37.1 R40.1 R42.1 R43.2 R46.1 R53.1 R54.2 R55.1 R56.2 R58.2 R62.1 R63.1 R64.1 R66.3 R68.2 R73.1 R75.2 R77.2 R78.1 T1.5 T5.2 T5.6 TSWR.7 U1.16 U2.16 U3.16 U6.1 U7.16 U9.3 U9.4 U9.7 U9.8 U9.10 U9.11 U9.12 U9.13 U9.18 U9.21 U11.16 U13.3 U13.6 U13.7 U14.3 U14.6 U14.7 U19.1 U21.16 U24.3 U24.5 U24.6 U24.8 U24.9 U24.11 U24.12 U24.13 U24.15 U24.16 U24.18 U25.3 U25.5 U25.6 U25.8 U25.9 U25.11 U25.12 U25.13 U25.15 U25.16 U25.18 U26.3 U26.5 U26.6 U26.8 U26.9 U26.11 U26.12 U26.13 U26.15 U26.16 U26.18 U27.3 U27.5 U27.6 U27.8 U27.9 U27.11 U27.12 U27.13 U27.15 U27.16 U27.18 | length 1.9
  Bottom Layer w0.4: v2(270.51,151.892) 271.454,152.836 U11.16@272.045,152.836
  other v1: 182.626,48.514 185.42,48.514 188.976,48.514 192.786,48.514 195.834,48.514 199.39,48.514 203.2,48.514 207.264,48.514 210.82,48.514 214.122,48.514 218.186,48.514 221.996,48.514 225.552,48.514 229.108,48.514 233.172,48.514 237.236,48.514 240.538,48.514 243.586,48.514 246.634,48.514 249.936,48.514 253.238,48.514 256.54,48.514 259.842,48.514 263.144,48.514 265.938,48.514 268.478,48.514 271.018,48.514 273.558,48.514 275.844,48.514 278.384,48.514 280.67,48.514 282.956,48.514 285.75,48.514 290.068,49.149 69.85,49.276 74.676,49.276 88.138,49.276 91.948,49.276 301.752,49.276 304.8,49.276 137.16,49.53 141.986,49.53 171.196,49.53 307.594,49.53 312.42,49.53 316.484,49.53 325.374,49.53 81.788,49.784 156.718,49.784 167.386,49.784 180.848,50.038 293.624,50.038 332.232,50.038 297.688,50.292 281.178,50.546 96.52,50.8 119.634,50.8 284.226,50.8 287.528,50.8 130.556,51.054 304.038,51.054 310.134,51.054 65.278,51.308 102.108,51.308 108.712,51.308 114.3,51.308 125.222,51.308 148.336,51.308 179.324,51.562 157.734,52.832 296.164,52.832 63.754,53.086 60.96,53.594 133.858,53.594 76.454,54.102 179.578,54.229 67.056,55.118 122.682,55.118 118.364,55.372 128.524,55.372 174.752,55.626 294.64,55.626 334.264,55.626 212.344,55.88 244.856,55.88 261.112,55.88 277.368,55.88 179.578,56.261 118.364,56.896 338.836,57.15 60.96,58.166 157.734,58.42 125.222,58.928 131.572,58.928 308.102,59.182 314.198,59.182 319.532,59.182 166.37,60.706 175.514,60.96 129.032,62.23 157.734,62.23 181.61,62.23 145.542,62.484 151.892,62.738 96.266,63.754 114.554,63.754 169.672,64.516 177.546,64.77 181.61,65.278 123.19,65.532 134.366,65.532 297.434,65.532 290.068,66.04 148.336,66.548 161.036,66.548 72.136,67.31 293.624,67.818 175.768,68.326 204.724,68.326 220.98,68.326 286.258,68.326 188.976,68.58 237.236,68.58 246.126,68.58 253.492,68.58 269.748,68.58 198.374,69.088 214.122,69.088 184.15,69.342 230.632,69.342 290.068,69.342 180.848,69.596 298.704,69.596 308.356,69.596 314.198,69.596 319.786,69.596 69.342,69.85 74.93,69.85 79.502,69.85 137.668,69.85 165.862,69.85 143.256,70.104 154.94,70.104 262.128,70.104 279.146,70.104 293.624,70.866 64.516,71.12 220.98,71.374 204.724,71.628 237.236,71.882 246.126,71.882 253.492,71.882 269.748,71.882 286.258,71.882 188.976,72.136 169.164,72.39 181.61,72.39 179.578,72.644 114.554,72.898 96.52,73.152 290.068,73.152 73.152,73.406 79.502,73.406 68.072,73.66 148.082,73.66 135.636,73.914 143.256,73.914 160.528,73.914 165.608,74.422 76.708,75.692 154.178,75.946 179.324,75.946 123.19,76.2 64.262,76.962 68.072,76.962 171.704,77.216 303.022,78.232 135.382,78.486 310.134,78.486 316.484,78.486 321.564,78.486 165.608,78.74 179.324,78.74 198.628,78.74 214.122,78.74 230.632,78.74 246.126,78.74 262.128,78.74 148.336,78.994 160.528,78.994 143.51,79.248 123.19,79.502 169.418,81.026 172.466,81.026 140.208,81.28 174.752,81.28 177.038,81.28 64.262,81.534 181.102,82.804 183.896,82.804 188.722,82.804 198.628,82.804 204.724,82.804 214.122,82.804 220.726,82.804 230.632,82.804 236.982,82.804 246.126,82.804 253.492,82.804 262.128,82.804 269.748,82.804 278.638,82.804 286.004,82.804 96.52,83.312 114.554,83.312 143.764,83.312 147.828,83.312 152.146,83.312 156.718,83.312 161.036,83.312 165.608,83.312 292.608,83.566 137.414,83.82 171.196,84.328 174.752,84.328 177.8,84.328 192.786,86.36 209.042,86.36 225.298,86.36 241.554,86.36 257.81,86.36 274.066,86.36 138.43,86.614 165.608,86.868 90.678,87.376 171.704,87.376 290.068,87.376 178.562,87.884 123.19,88.9 150.876,88.9 135.128,89.154 160.274,89.154 143.764,89.408 188.722,89.408 169.164,89.662 165.608,90.932 178.562,90.932 123.19,91.186 171.704,91.948 63.754,92.964 155.194,92.964 178.562,93.472 96.266,93.98 114.554,93.98 138.684,94.234 149.606,94.234 160.274,94.234 143.764,94.996 165.608,94.996 171.704,96.266 178.562,96.52 195.834,97.79 212.09,97.79 228.346,97.79 260.858,97.79 277.114,97.79 143.51,98.298 123.698,98.552 136.144,98.552 147.574,98.552 151.892,98.552 156.464,98.552 160.782,98.552 165.1,98.552 171.704,98.552 176.276,98.806 178.054,100.33 62.738,100.584 163.068,101.092 169.418,101.092 174.498,102.108 140.462,102.362 298.45,102.362 96.52,102.87 114.554,102.87 88.646,103.124 130.302,103.124 186.436,103.378 193.548,103.378 201.422,103.378 209.804,103.378 219.202,103.378 228.6,103.378 236.982,103.378 245.364,103.378 255.27,103.378 266.7,103.378 276.606,103.378 285.242,103.378 182.372,103.632 160.528,103.886 170.434,103.886 118.11,104.394 145.034,104.394 167.132,104.648 178.562,105.156 62.738,105.664 74.676,106.426 123.952,107.188 135.128,107.188 140.208,107.188 175.26,107.188 273.304,107.188 278.384,107.188 118.11,107.696 147.066,107.696 156.464,107.696 163.322,108.712 180.848,109.22 294.132,109.728 159.766,110.236 139.7,110.744 145.034,110.998 170.434,110.998 74.676,111.506 136.398,111.76 273.304,111.76 278.384,111.76 95.504,112.014 97.282,112.014 113.538,112.014 115.316,112.014 118.364,112.268 124.206,112.522 128.016,112.522 131.826,112.522 154.686,113.284 109.728,113.538 134.112,113.538 90.17,113.792 106.68,113.792 98.044,114.3 101.854,114.554 148.082,115.57 152.146,115.57 74.93,117.094 90.17,117.094 130.302,117.094 158.75,117.094 99.568,117.602 106.172,117.602 112.522,117.602 117.856,117.602 125.476,117.602 155.702,118.618 96.012,119.38 103.124,119.634 121.666,119.634 115.316,119.888 90.17,120.142 109.728,120.142 64.77,120.396 68.834,120.396 73.152,120.396 77.47,120.396 81.28,120.396 84.836,120.396 128.778,120.65 133.096,121.158 310.896,121.412 99.568,122.174 105.918,122.428 112.014,122.428 66.294,122.682 70.866,122.682 75.184,122.682 79.502,122.682 83.058,122.682 90.17,123.19 96.012,123.444 170.18,124.206 278.13,124.968 64.77,125.222 68.834,125.222 73.152,125.222 77.47,125.222 81.026,125.222 84.582,125.222 90.17,126.238 155.194,126.492 278.13,126.492 110.236,127.254 311.15,127.254 103.632,127.508 170.434,127.508 277.368,127.508 276.606,128.27 162.306,128.524 119.126,128.778 121.666,128.778 124.206,128.778 275.59,129.286 142.494,129.794 274.574,130.302 305.816,130.556 273.558,131.318 142.494,131.826 272.542,132.334 296.164,132.588 306.07,133.096 271.526,133.35 276.606,133.35 103.378,134.112 274.828,134.366 277.876,134.366 154.432,135.636 162.306,135.89 113.538,136.398 271.272,136.398 236.474,136.652 93.98,136.906 248.412,137.16 268.224,137.16 157.988,137.414 125.73,138.176 270.002,138.684 267.97,138.938 168.656,139.192 275.336,139.7 261.62,140.208 101.346,140.462 267.462,140.716 161.798,140.97 260.096,141.478 266.446,141.986 258.572,142.494 256.286,142.748 107.95,143.256 140.462,143.764 145.034,143.764 149.098,143.764 264.668,144.018 156.718,144.272 172.72,144.526 110.998,144.78 177.546,144.78 114.046,145.034 117.602,145.034 107.696,145.796 262.636,145.796 99.314,146.05 102.362,146.05 105.156,146.05 94.742,147.066 198.882,147.32 181.61,148.336 281.432,149.098 100.584,151.13 83.82,151.638 86.614,151.638 89.916,151.638 94.742,151.638 222.758,152.146 209.804,153.162 212.598,153.162 215.392,153.162 201.168,153.67 220.98,153.924 218.948,155.956 245.618,159.766 278.892,160.02 64.516,161.036 229.616,161.036 244.856,161.544 246.888,161.544 294.132,161.544 264.414,161.798 66.548,162.052 226.568,162.814 271.018,162.814 255.016,163.576 308.356,163.83 291.846,164.084 265.938,164.338 271.018,164.592 97.282,165.354 200.914,165.608 279.4,166.116 274.32,166.37 281.94,166.37 285.75,166.37 289.306,166.37 218.694,166.624 263.144,167.64 61.976,168.402 121.92,169.672 134.112,169.672 144.78,169.672 157.988,169.672 206.756,169.672 211.328,169.672 215.138,169.672 219.71,169.672 113.538,169.926 167.894,169.926 174.244,169.926 239.776,169.926 65.532,170.18 90.932,170.688 201.676,170.942 233.934,171.45 218.948,172.466 246.126,172.466 264.922,172.974 292.862,172.974 314.96,172.974 67.818,173.228 74.93,173.228 81.788,173.228 276.86,173.228 96.774,174.498 116.332,174.498 139.446,174.498 163.576,174.498 187.706,174.498
  other v2: 298.196,87.376 301.244,87.376 305.054,87.63 310.388,87.63 315.976,87.63 324.104,87.63 330.708,87.63 336.296,88.646 334.264,95.758 337.566,96.266 304.038,97.79 307.34,97.79 311.404,97.79 315.468,97.79 321.564,97.79 326.644,97.79 301.498,98.044 329.946,98.044 303.784,99.568 300.736,100.838 332.232,100.838 304.546,103.124 337.566,103.124 332.486,105.156 319.024,106.426 326.898,106.426 315.976,106.68 311.404,106.934 322.834,106.934 300.99,107.696 304.038,107.696 334.264,107.696 309.626,108.204 324.612,108.204 321.056,108.458 313.69,108.966 302.768,109.474 329.692,109.474 337.566,109.474 301.244,111.252 304.038,111.252 332.232,111.506 324.866,113.538 330.2,113.538 309.88,113.792 316.992,113.792 321.056,113.792 337.058,113.792 312.928,115.57 326.644,115.824 290.83,117.348 337.058,117.348 325.374,122.936 333.756,122.936 336.296,122.936 327.152,123.444 333.756,124.46 320.802,124.714 325.628,125.222 328.422,126.238 320.802,126.746 336.296,126.746 320.802,129.032 316.484,132.334 319.532,132.334 322.58,132.334 315.468,133.096 317.754,133.35 321.056,133.604 323.85,133.604 319.278,134.366 322.58,134.366 295.91,135.382 298.958,135.382 302.514,135.382 304.8,135.382 307.594,135.382 312.166,135.382 317.754,135.382 321.056,135.382 323.85,135.382 297.688,139.446 300.228,139.446 302.768,139.446 305.562,139.446 308.102,139.446 312.42,139.446 292.1,139.7 335.026,139.954 334.518,141.224 338.582,141.732 302.768,142.494 308.356,142.494 295.402,143.256 298.704,143.51 232.918,143.764 338.582,144.018 224.536,144.526 227.838,144.526 296.926,145.288 300.736,145.288 274.574,145.796 215.646,146.05 218.694,146.05 223.012,146.304 226.06,146.304 229.108,146.304 291.846,146.304 208.534,146.558 211.582,146.558 237.49,146.812 240.792,146.812 243.84,146.812 338.582,147.066 298.958,148.59 338.328,149.86 265.684,151.384 230.886,151.638 233.426,151.638 236.728,151.638 299.212,152.908 261.874,153.416 263.652,153.416 338.582,153.416 263.144,154.686 324.104,154.94 336.804,154.94 321.818,155.194 266.954,155.448 339.344,156.718 318.77,157.226 322.326,157.226 326.644,157.226 329.692,157.226 266.446,157.48 296.418,157.988 302.006,158.496 326.644,158.496 329.692,158.496 267.716,159.004 270.256,159.258 327.66,159.512 328.422,159.512 318.77,159.766 322.326,160.02 299.466,160.528 339.344,160.528 307.696,160.782 297.434,161.798 326.644,163.068 339.09,163.576 329.946,164.338 337.82,164.592 322.326,164.846 333.502,164.846 337.058,165.608 335.28,165.862 338.582,165.862 299.72,166.37 324.358,167.132 328.168,167.132 331.47,167.132 322.326,167.386 334.01,168.148 284.734,169.164 300.228,169.672 305.054,169.672 309.626,169.672 313.69,169.672 334.518,170.434 324.104,170.688 326.136,170.688 328.168,170.688 330.2,170.688 332.232,170.688
  other v3: 61.976,50.292 176.022,50.292 337.058,50.292 152.146,105.664 186.69,167.894 337.058,172.974 61.976,173.228
  other v5: 250.698,143.256 329.692,151.638 327.914,151.892
HF-VHF-SELECT: C108.1 C109.1 C124.2 D4.2 D31.2 D32.2 K24.12 U2.13 U4.8 U12.8 | length 192.9
  Top Layer w0.4: U12.8@176.784,131.73 176.777,133.034 176.777,135.629 184.15,143.002 v2(184.15,151.638) 205.486,151.638 K24.12@210.312,156.464 211.582,157.734 211.836,157.734
  Bottom Layer w0.4: U4.8@98.806,158.781 98.806,171.196 99.822,172.212 179.578,172.212 180.848,170.942 180.848,160.528 184.15,157.226 v2(184.15,151.638) ; U2.13@204.033,146.884 204.033,151.963 208.534,156.464 K24.12@210.312,156.464 211.406,157.558 D32.2@211.406,159.258
  Bottom Layer w0.8: U12.8@176.784,131.73 176.53,131.476 C109.1@176.53,129.808 177.892,129.808 D31.2@178.562,130.478
  Bottom Layer w1.2: D4.2@96.52,157.656 97.554,157.656 U4.8@98.806,158.908
HFAMP_IN: R61.2 R63.2 U4.2 U4.7 | length 18.7
  Top Layer w0.8: R63.2@94.692,166.624 R61.2@94.692,162.814 94.996,162.814 96.012,161.798 99.314,161.798 ; 99.314,161.544 102.006,159.106 U4.7@102.006,158.908
  Top Layer w1.2: U4.2@102.006,152.908 U4.7@102.006,158.908
HFAMPBIASON: Q2.1 Q7.1 R4.2 R41.2 U2.12 | length 285.9
  Top Layer w0.8: R4.2@62.738,67.26 Q7.1@64.786,67.244 ; Q2.1@88.072,163.56 R41.2@88.088,165.1
  Bottom Layer w0.4: R4.2@62.738,67.26 60.198,69.799 60.198,162.56 60.96,163.322 65.024,163.322 73.406,171.704 87.884,171.704 87.884,170.18 ; Q2.1@88.072,163.56 87.884,164.562 87.884,172.974 204.724,172.974 204.724,159.766 203.383,158.425 U2.12@203.383,146.884
HFAMPOUT: K8.5 K8.8 K10.5 K10.8 K12.5 K12.8 K14.5 K14.8 K16.5 K16.8 K18.5 K18.8 K20.5 K20.8 T1.4 | length 172.1
  Top Layer w1.6: T1.4@175.133,74.676 179.578,68.072 179.578,58.293 180.594,58.293 ; 180.594,58.42 K8.5@182.626,58.42 K8.8@182.626,53.34 182.626,51.054 183.134,50.546 278.384,50.546 280.162,52.324 K20.8@280.162,53.34 K20.5@280.162,58.42 ; 198.882,50.546 K10.8@198.882,53.34 K10.5@198.882,58.42 ; 215.138,50.546 215.179,53.299 K12.8@215.138,53.34 K12.5@215.138,58.42 ; 231.394,50.546 K14.8@231.394,53.34 K14.5@231.394,58.42 ; 247.65,50.546 K16.8@247.65,53.34 K16.5@247.65,58.42 ; 263.906,50.546 263.956,53.29 K18.8@263.906,53.34 K18.5@263.906,58.42
HFBPF_OUT: K9.5 K9.8 K11.5 K11.8 K13.5 K13.8 K15.5 K15.8 K17.5 K17.8 K19.5 K19.8 K21.5 K21.8 TSWR.3 | length 166.4
  Top Layer w1.6: TSWR.3@166.263,108.763 TSWR.3@166.264,108.772 182.626,100.076 ; K9.8@182.626,92.71 182.626,97.282 K9.5@182.626,97.79 182.626,100.076 ; 198.867,99.822 K11.5@198.882,97.79 K11.8@198.882,92.71 ; 215.098,99.822 215.098,97.83 K13.5@215.138,97.79 K13.8@215.138,92.71 ; K15.8@231.394,92.71 K15.5@231.394,97.79 231.404,99.822 ; 247.635,99.822 K17.5@247.65,97.79 K17.8@247.65,92.71 ; K19.8@263.906,92.71 K19.5@263.906,97.79 263.916,99.822 ; K21.8@280.162,92.71 K21.5@280.162,97.79 280.162,100.076 182.626,100.076
HFSWR_OUT: K25.4 K25.9 K35.5 K35.8 L35.1 TSWR.4 TSWR.5 | length 114.7
  Top Layer w1: TSWR.4@184.264,108.772 184.264,110.772 TSWR.5@184.514,111.022 ; L35.1@191.842,120.142 195.072,122.682 269.494,122.682 K35.5@270.764,123.952
  Top Layer w1.6: TSWR.5@184.514,111.022 194.818,110.572 ; L35.1@191.842,120.142 194.818,117.166 K25.4@194.818,113.03 K25.9@194.818,107.95 194.818,110.572 ; 194.818,110.015 194.818,110.572 ; K35.8@270.764,118.872 K35.5@270.764,123.952
HFSWRDETBACKW: R50.1 R54.1 U12.7 | length 28.4
  Top Layer w0.8: R50.1@181.819,120.65 184.06,122.891 R54.1@184.912,122.891
  Bottom Layer w0.8: U12.7@179.984,131.73 179.984,132.182 178.562,133.604 174.752,133.604 174.752,124.714 175.768,123.698 179.578,123.698 180.848,122.428 180.848,121.62 R50.1@181.819,120.65
HFSWRDETFORW: R36.2 R49.1 U12.2 | length 19.2
  Top Layer w0.8: R36.2@165.1,122.891 165.145,122.936 166.116,122.936 168.402,120.65 168.701,120.65 168.701,122.637 168.656,122.682 176.936,122.682 U12.2@179.984,125.73
HFTUNER_OUT: K24.3 K24.10 K33.3 K33.10 K35.3 K35.10 L42.2 | length 117.2
  Top Layer w1.6: K24.3@215.392,161.544 217.932,161.544 234.696,144.78 260.35,144.78 265.684,139.446 265.684,136.652 275.844,125.476 ; K33.10@260.35,107.95 K33.3@260.35,113.03
  Top Layer w1.8: K24.10@210.312,161.544 K24.3@215.392,161.544 ; K33.3@260.35,113.03 263.398,116.078 ; L42.2@263.834,120.142 263.834,116.514 263.398,116.078 ; 275.844,125.476 K35.3@275.844,123.952 K35.10@275.844,118.872 275.844,117.348 274.574,116.078 263.398,116.078
J3_3: J3.3 R3.2 | length 3.3
  Bottom Layer w0.4: R3.2@283.16,152.4 283.16,155.652 J3.3@283.21,155.702
J3_4: J3.4 R7.1 | length 2.3
  Bottom Layer w0.4: J3.4@283.21,158.242 R7.1@283.21,160.578
J3_5: J3.5 R8.2 | length 2.3
  Bottom Layer w0.4: R8.2@285.75,153.366 J3.5@285.75,155.702
J3_6: J3.6 R9.1 | length 2.3
  Bottom Layer w0.4: J3.6@285.75,158.242 R9.1@285.75,160.578
J3_7: J3.7 R10.2 | length 2.4
  Bottom Layer w0.4: R10.2@288.036,153.366 288.036,155.448 J3.7@288.29,155.702
J3_8: J3.8 R11.1 | length 2.4
  Bottom Layer w0.4: J3.8@288.29,158.242 288.544,158.496 R11.1@288.544,160.578
J3_9: J3.9 R12.2 | length 4.8
  Bottom Layer w0.4: J3.9@290.83,155.702 295.606,155.702 R12.2@295.656,155.652